# Altium PCB ACS_2.PcbDoc
Units mm, origin at the board's own origin, x right, y up, seen from the top; angles counter-clockwise.
Board outline 90.17 x 95.89 mm, 4 copper layers (Top Layer, Signal Layer 1, Internal Plane 3, Bottom Layer), stack 1.568 mm thick; 50 components, 43 nets, 334 pads, 42 vias.
Unrouted connection lines stored in the file: 4.
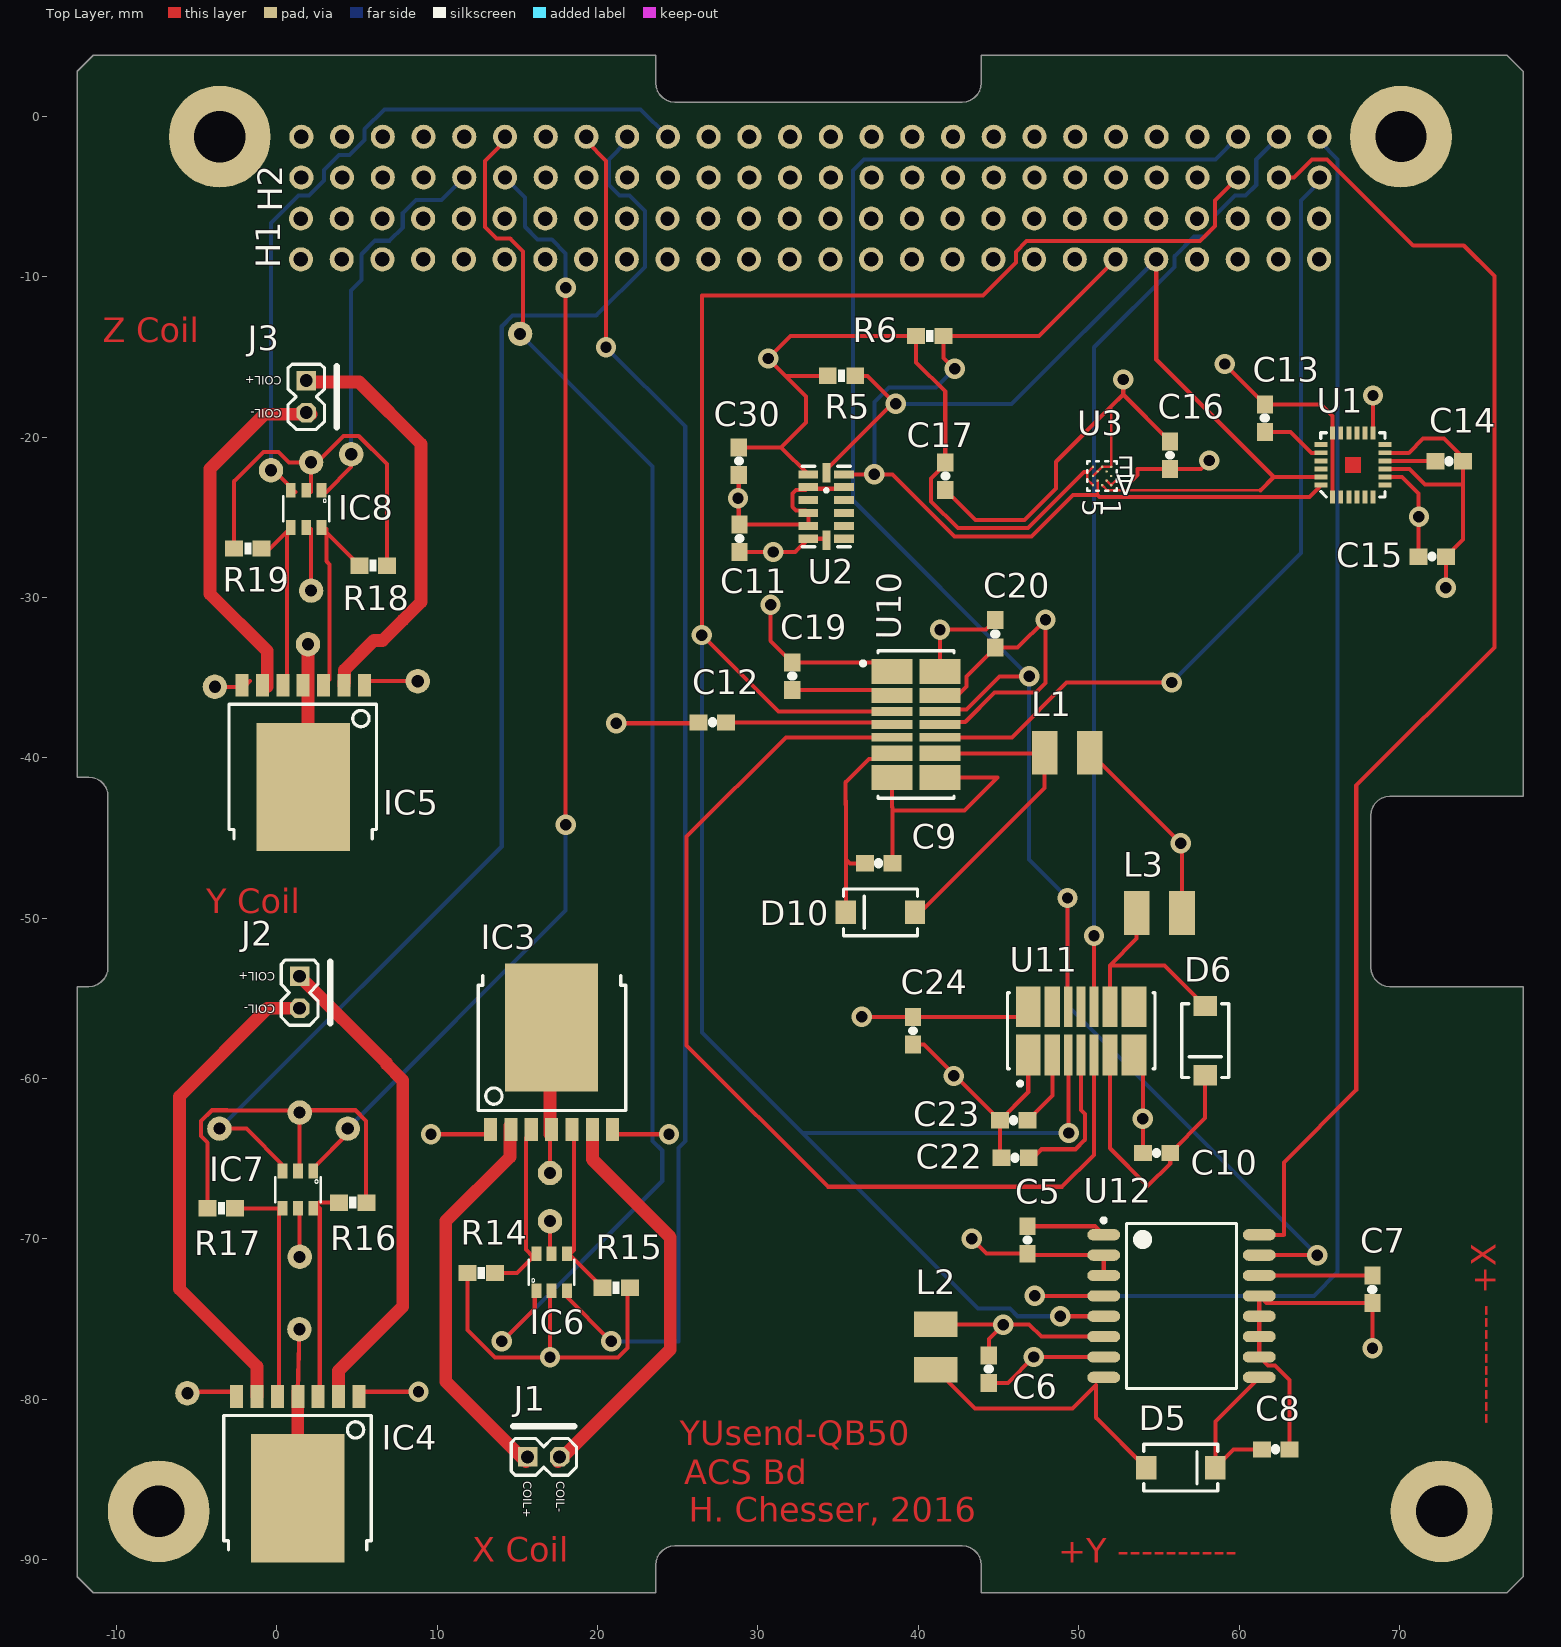
[diagram p0: Top Layer view]
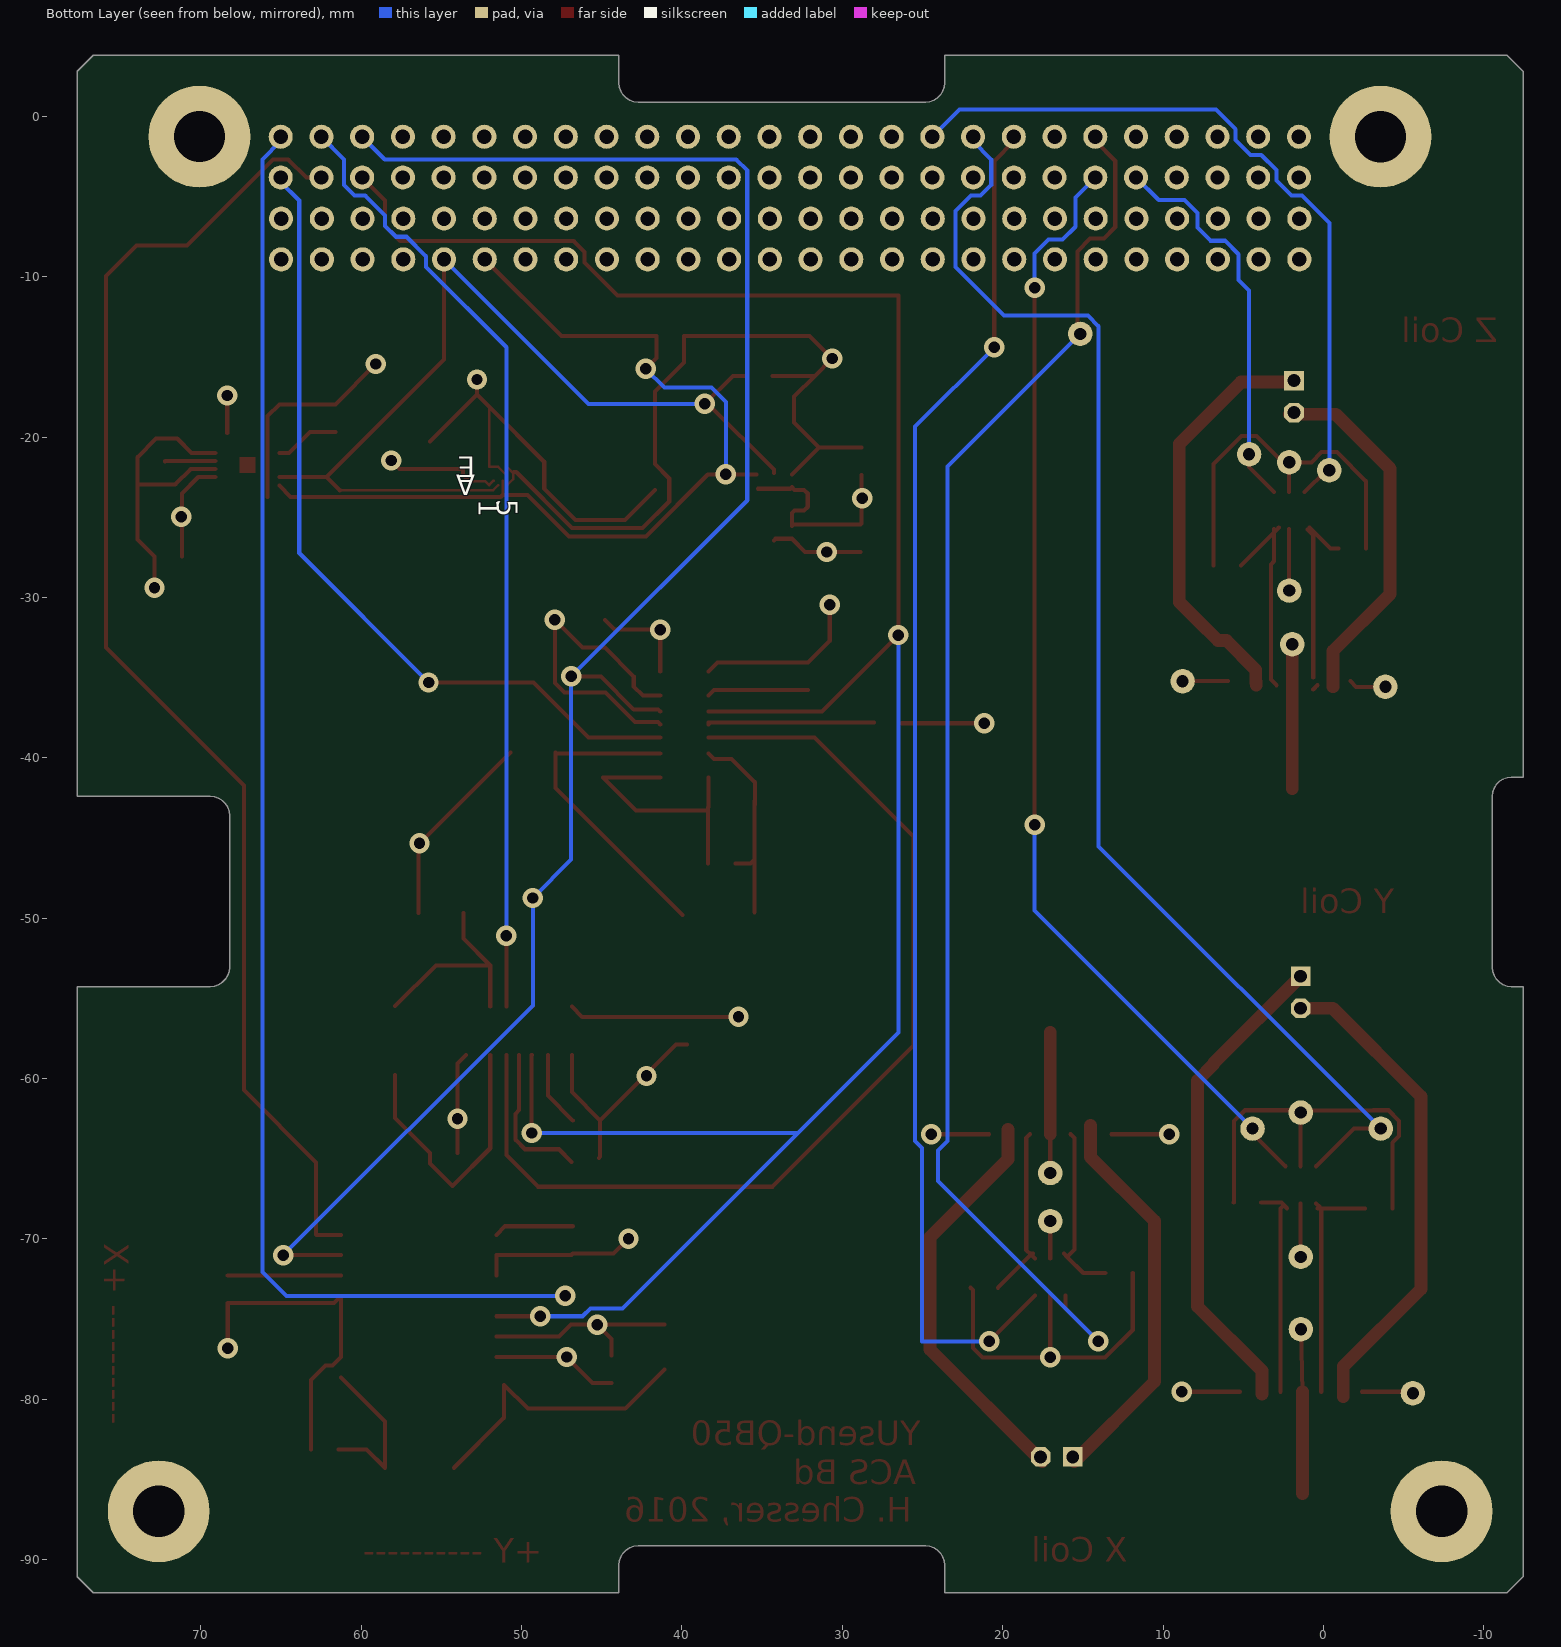
[diagram p1: Bottom Layer view, seen from below]
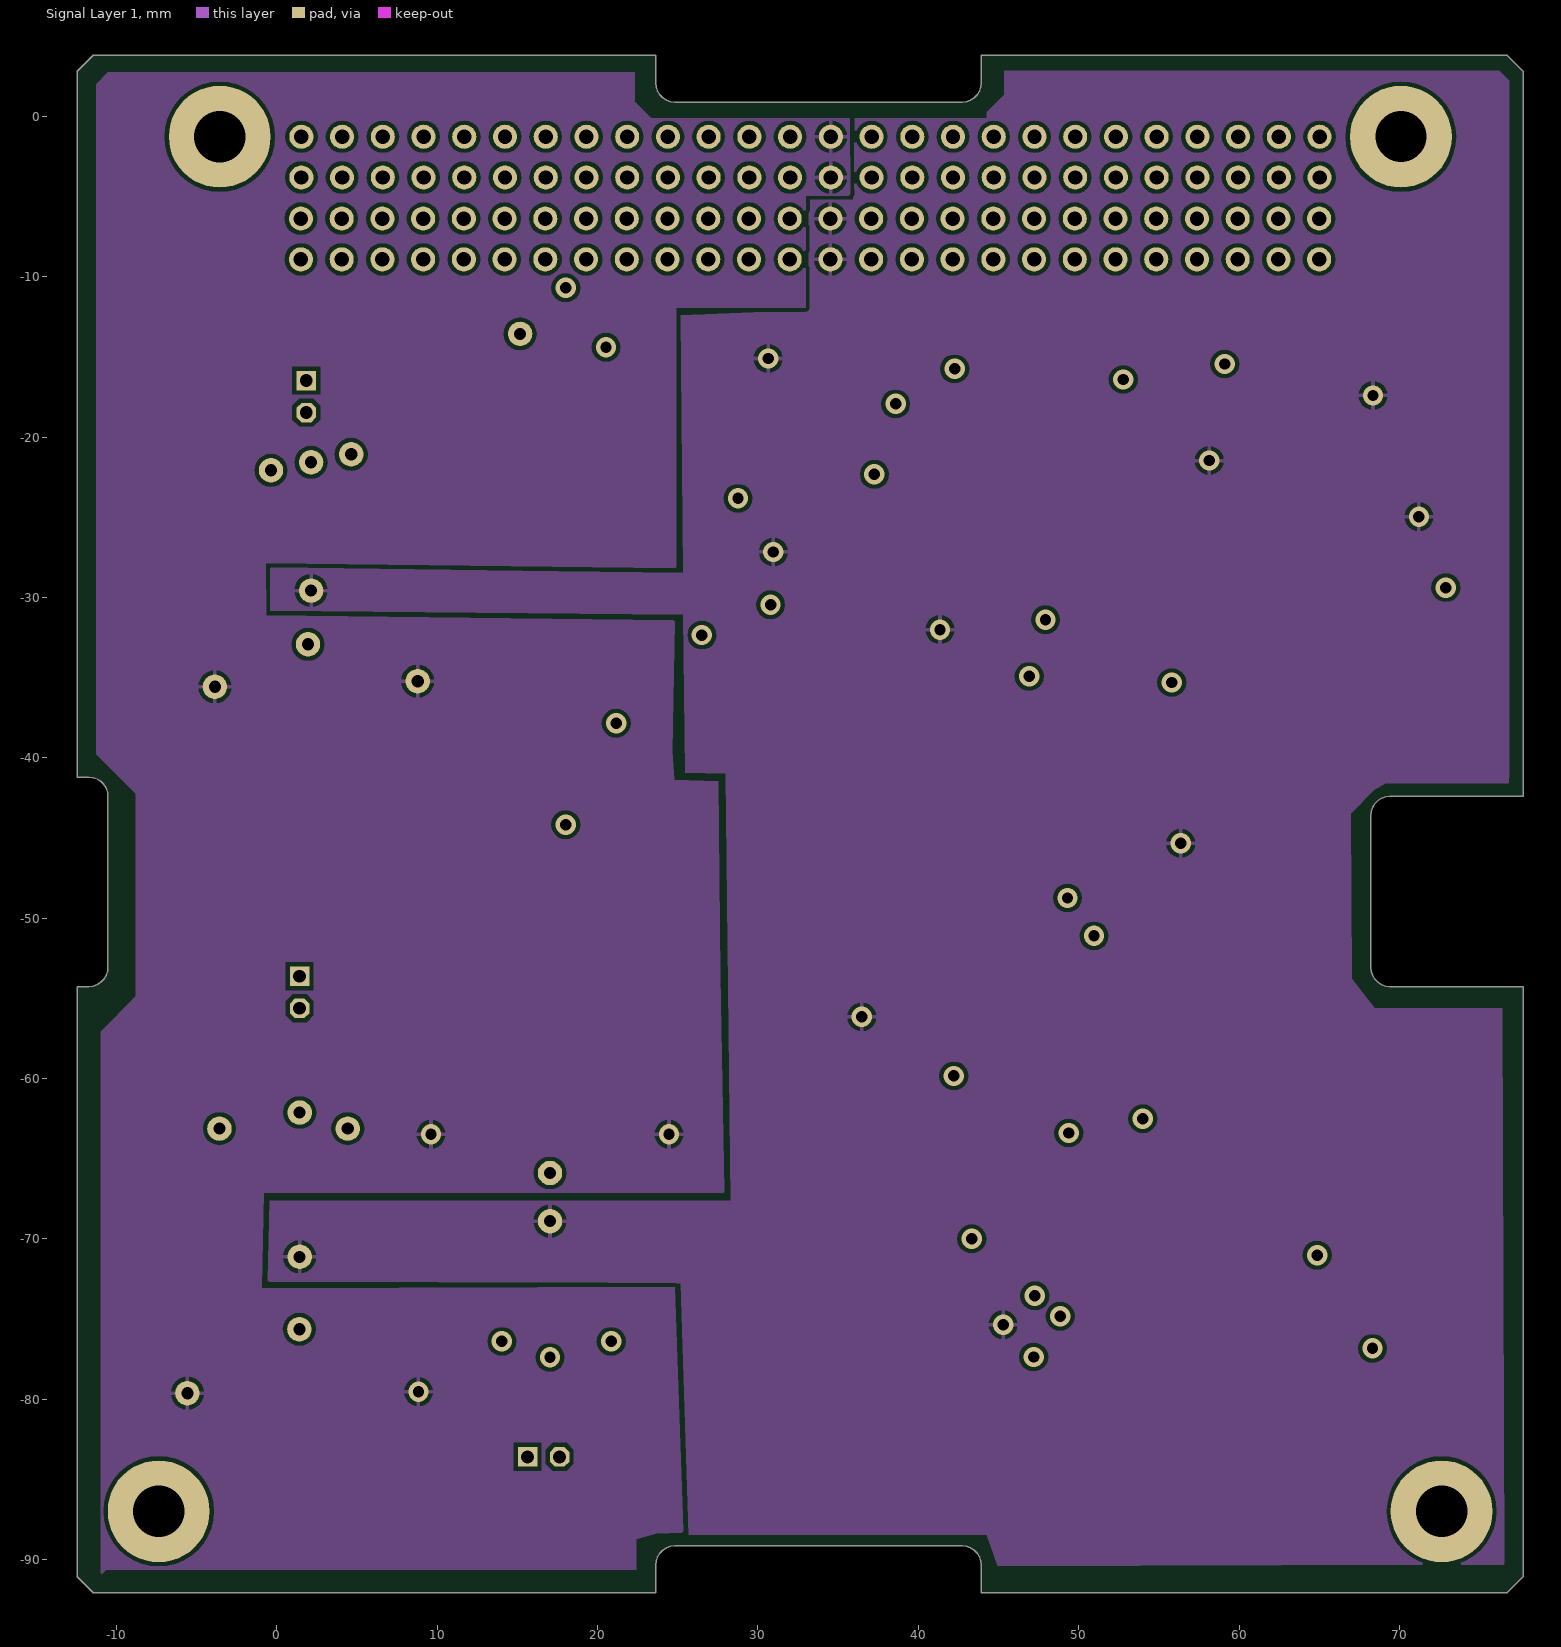
[diagram p2: Signal Layer 1]
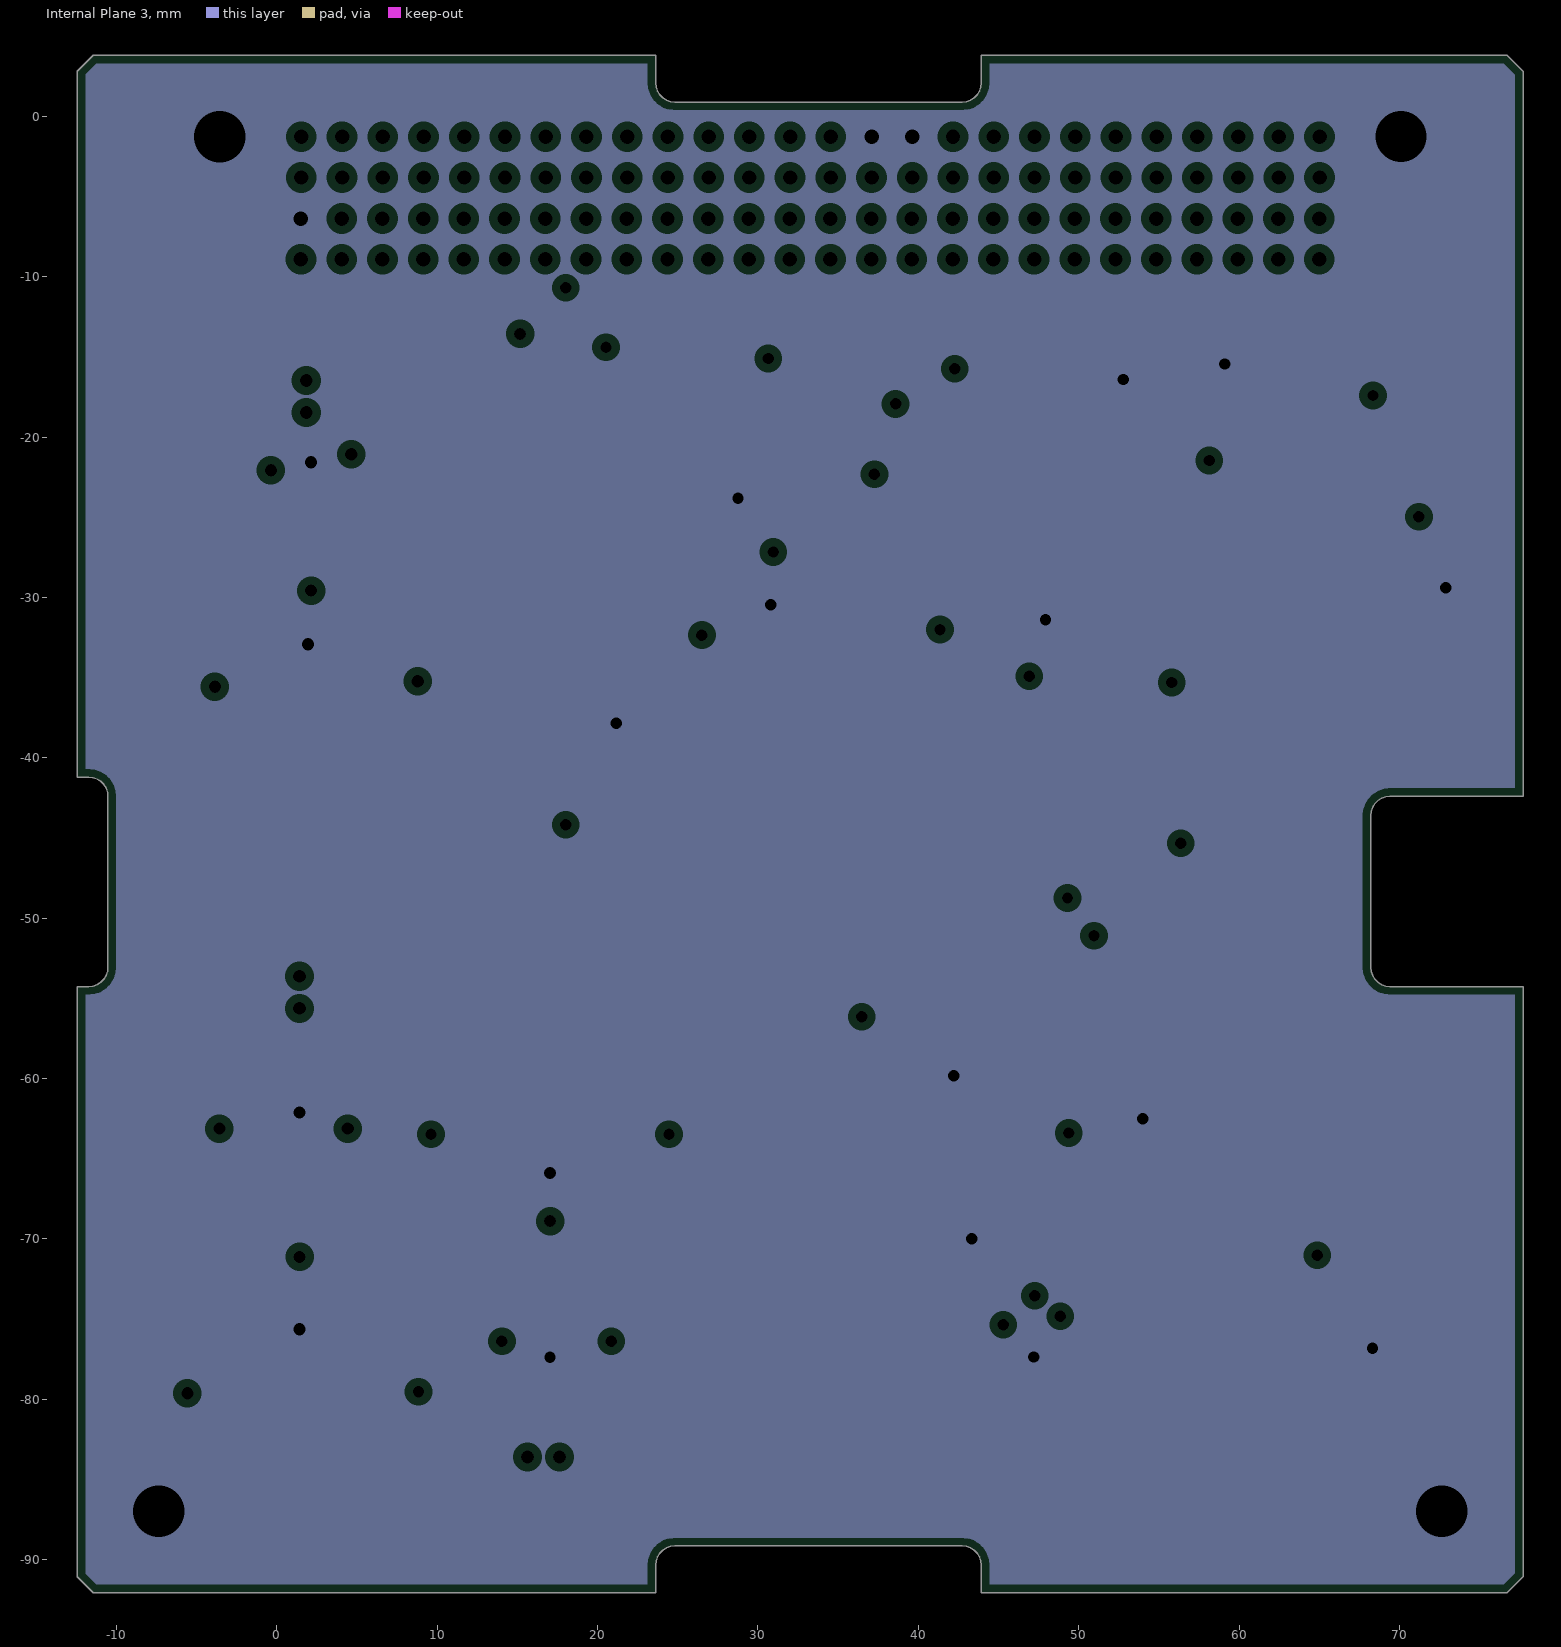
[diagram p3: Internal Plane 3, clearances drawn from the general rule]

## Layer stack, top to bottom
Top Solder: solder mask 0.0102, Solder Resist, Dk 3.5
Top Layer: signal copper 0.0356
Dielectric 1: core 0.475, FR-4, Dk 4.2
Signal Layer 1: signal copper 0.036
Dielectric 3: core 0.475, FR-4, Dk 4.2
Internal Plane 3: plane copper 0.036, net GND
Dielectric 2: core 0.475, FR-4, Dk 4.2
Bottom Layer: signal copper 0.0356
Bottom Solder: solder mask 0.0102, Solder Resist, Dk 3.5

## Board outline
76.715,3.815 43.935,3.815 43.935,2.095 43.905,1.828 43.816,1.574 43.673,1.347 43.483,1.157 43.256,1.014 43.002,0.925 42.735,0.895 24.815,0.895 24.548,0.925 24.294,1.014 24.067,1.157 23.877,1.347 23.734,1.574 23.645,1.828 23.615,2.095 23.615,3.815 -11.455,3.815 -12.455,2.815 -12.455,-41.205 -11.735,-41.205 -11.468,-41.235 -11.214,-41.324 -10.987,-41.467 -10.797,-41.657 -10.654,-41.884 -10.565,-42.138 -10.535,-42.405 -10.535,-53.065 -10.565,-53.332 -10.654,-53.586 -10.797,-53.813 -10.987,-54.003 -11.214,-54.146 -11.468,-54.235 -11.735,-54.265 -12.455,-54.265 -12.455,-91.075 -11.455,-92.075 23.615,-92.075 23.615,-90.355 23.645,-90.088 23.734,-89.834 23.877,-89.607 24.067,-89.417 24.294,-89.274 24.548,-89.185 24.815,-89.155 42.735,-89.155 43.002,-89.185 43.256,-89.274 43.483,-89.417 43.673,-89.607 43.816,-89.834 43.905,-90.088 43.935,-90.355 43.935,-92.075 76.715,-92.075 77.715,-91.075 77.715,-54.265 69.415,-54.265 69.148,-54.235 68.894,-54.146 68.667,-54.003 68.477,-53.813 68.334,-53.586 68.245,-53.332 68.215,-53.065 68.215,-43.605 68.245,-43.338 68.334,-43.084 68.477,-42.857 68.667,-42.667 68.894,-42.524 69.148,-42.435 69.415,-42.405 77.715,-42.405 77.715,2.815

## Design rules (kind name [scope] priority, off if disabled: settings)
Clearance [All] p1: gap=0.254
PlaneClearance [All] p1: clearance=0.508
PlaneConnect [All] p1: planeconnectstyle=Relief reliefexpansion=0.508 reliefentries=4 reliefconductorwidth=0.254 reliefairgap=0.254
PolygonConnect [All] p1: connectstyle=Relief reliefconductorwidth=0.254 reliefentries=4 polygonreliefangle="90 Angle" airgapwidth=0.254
RoutingVias [All] p1: holewidth=0.711 width=1.27 viastyle="Through Hole" minholewidth=0.711 minwidth=1.27 maxholewidth=0.711 maxwidth=1.27
SolderMaskExpansion [All] p1: expansion=0.102
Width GroundTrace [All] p1: maxlimit=0.254 minlimit=0.254 preferedwidth=0.254
Width CoilTraces [(InNet('DRIVE-XA') OR InNet('DRIVE-XB') OR InNet('DRIVE-YA') OR InNet('DRIVE-YB') OR InNet('DRIVE-ZA') OR InNet('DRIVE-ZB'))] p2: maxlimit=1 minlimit=0.254 preferedwidth=0.8 toplayer_minwidth=0.5 midlayer1_maxwidth=0.254 midlayer1_prefwidth=0.254 bottomlayer_minwidth=0.5 minimp=50.000000 maximp=50.000000 favimp=50.000000
Width [InNet('GND')] p3: maxlimit=0.5 minlimit=0.254 preferedwidth=0.4 midlayer1_maxwidth=0.254 midlayer1_prefwidth=0.254 minimp=50.000000 maximp=50.000000 favimp=50.000000
Width PowerTraces [(InNet('3.3V') AND InNet('5V'))] p4: maxlimit=0.5 minlimit=0.254 preferedwidth=0.4 midlayer1_maxwidth=0.254 midlayer1_prefwidth=0.254 minimp=50.000000 maximp=50.000000 favimp=50.000000
27 further rules are at their usual default settings.

## Classes and differential pairs
net class DIR[2..0]: DIR0 DIR1 DIR2
net class I2C(TWI)[1..0]: I2C(TWI)0 I2C(TWI)1
net class PWM[2..0]: PWM0 PWM1 PWM2

## Components (designator, comment, footprint, x,y, rotation, side; value= is the part's Value field where it differs from the comment)
C5 "1uF" 0603-CAP 46.812,-70.079 r90 top
C6 "1uF" 0603-CAP 44.399,-78.13 r90 top
C7 "1uF" 0603-CAP 68.326,-73.152 r90 top
C8 "100nF" 0603-CAP 62.281,-83.134 r0 top
C9 "100nF" 0603-CAP 37.516,-46.584 r0 top
C10 "100nF" 0603-CAP 54.864,-64.643 r180 top
C11 "0.1uF" 0603-CAP 28.854,-26.314 r90 top
C12 "1uF" 0603-CAP 27.153,-37.795 r0 top
C13 "2.2nF" 0603-CAP 61.62,-18.821 r90 top
C14 "0.1uF" 0603-CAP 73.101,-21.514 r0 top
C15 "10nF" 0603-CAP 72.034,-27.457 r0 top
C16 "100nF" 0603-CAP 55.702,-21.133 r90 top
C17 "100nF" 0603-CAP 41.681,-22.428 r270 top
C19 "1uF" 0603-CAP 32.131,-34.9 r270 top
C20 "1uF" 0603-CAP 44.806,-32.283 r90 top
C22 "1uF" 0603-CAP 46.025,-64.948 r0 top
C23 "1uF" 0603-CAP 45.949,-62.611 r0 top
C24 "1uF" 0603-CAP 39.675,-57.023 r90 top
C30 "0.1uF" 0603-CAP 28.804,-21.488 r270 top
D5 "<b>Diode</b> / Standard reverse protection diodes and small signal diodes." DIODE-SMA 56.363,-84.277 r0 top
D6 "<b>Diode</b> / Standard reverse protection diodes and small signal diodes." DIODE-SMA 57.887,-57.633 r270 top
D10 "<b>Diode</b> / Standard reverse protection diodes and small signal diodes." DIODE-SMA 37.643,-49.632 r180 top
H1 "H?" SAMTEC_ESQ_126_39_G_D 1.499,-8.915 r90 top
H2 "H?" SAMTEC_ESQ_126_39_G_D 1.524,-3.81 r90 top
IC3 "BD621*HFP" HRP7 17.131,-58.097 r0 top
IC4 "BD621*HFP" HRP7 1.303,-84.915 r180 top
IC5 "BD621*HFP" HRP7 1.64,-40.555 r180 top
IC6 "SN74LVC1G18-SOT23" SOT23-6 17.131,-72.097 r0 top
IC7 "SN74LVC1G18-SOT23" SOT23-6 1.317,-66.925 r180 top
IC8 "SN74LVC1G18-SOT23" SOT23-6 1.83,-24.475 r180 top
J1 "PINHD-1X2-COIL" HEADER-1X2-COIL 15.631,-83.597 r0 top
J2 "PINHD-1X2-COIL" HEADER-1X2-COIL 1.417,-53.625 r270 top
J3 "PINHD-1X2-COIL" HEADER-1X2-COIL 1.83,-16.475 r270 top
L1 "<b>Inductors</b>" 1210 49.301,-39.675 r180 top
L2 "<b>Inductors</b>" 1210 41.097,-76.733 r270 top
L3 "Inductor" 1210 55.042,-49.682 r180 top
R5 "4.7k" 0603-RES 35.204,-16.18 r0 top
R6 "4.7k" 0603-RES 40.716,-13.691 r0 top
R14 "4.7k" 0603-RES 12.751,-72.136 r180 top
R15 "4.7k" 0603-RES 21.145,-73.05 r0 top
R16 "4.7k" 0603-RES 4.724,-67.742 r0 top
R17 "4.7k" 0603-RES -3.454,-68.097 r180 top
R18 "4.7k" 0603-RES 5.994,-28.016 r0 top
R19 "4.7k" 0603-RES -1.803,-26.949 r180 top
U1 "ITG-3200" QFN-24 67.107,-21.742 r90 top
U2 "ADXL345" LGA14 34.265,-24.341 r90 top
U3 "BMM150" BGA_1590X1590 51.46,-22.428 r180 top
U10 "ADXRS453BEYZ" ADI-EY-14-1_V 39.853,-37.922 r270 top
U11 "ADXRS453BEYZ" ADI-EY-14-1_V 50.156,-57.024 r0 top
U12 "ADXRS453BRGZ" ADI-RG-16-1_M 56.413,-74.193 r0 top

## Footprints (in the part's own frame and the unit in brackets; to place one, negate y for a bottom-side part, rotate by r counter-clockwise, add the part's x,y. Pads: shape width x height; smd on the part's side, far side on the other; paste and mask are expansions set on the pad)
0603-CAP [mil]
  rect 44x40 smd: 1(-33.46,0) 2(34,0)
  silkscreen extent 0,-1 0,2
0603-RES [mil]
  rect 44x40 smd: 1(-33.46,0) 2(34,0)
  silkscreen extent -9,-15 9,15
1210 [mil]
  rect 63x107 smd: 1(-55.12,0) 2(56,0)
ADI-EY-14-1_V [mm] "LCC, 14-Leads, Body 4x9mm"
  rect 1.55x2.55 smd: 1(-3.3,-1.5) 7(3.3,-1.5) 8(3.3,1.5) 14(-3.3,1.5)
  rect 0.95x2.55 smd: 2(-1.8,-1.5) 6(1.8,-1.5) 9(1.8,1.5) 13(-1.8,1.5)
  rect 0.55x2.55 smd: 3(-0.8,-1.5) 4(0,-1.5) 5(0.8,-1.5) 10(0.8,1.5) 11(0,1.5) 12(-0.8,1.5)
  silkscreen extent -4.6,-3.43 4.6,2.37, body extent -4.5,-2.29 4.5,2.16, height 9.15
ADI-RG-16-1_M [mm] "SOIC, 16-Leads, Body 10.3x7.8mm, Pitch 1.27mm, IPC Low Density"
  oval 2.05x0.7 smd: 1(-4.85,4.445) 2(-4.85,3.175) 3(-4.85,1.905) 4(-4.85,0.635) 5(-4.85,-0.635) 6(-4.85,-1.905) 7(-4.85,-3.175) 8(-4.85,-4.445) 9(4.85,-4.445) 10(4.85,-3.175) 11(4.85,-1.905) 12(4.85,-0.635) 13(4.85,0.635) 14(4.85,1.905) 15(4.85,3.175) 16(4.85,4.445)
  silkscreen extent -4.97,-5.15 3.42,5.47, body extent -3.9,-5.15 3.9,5.15, height 3.73
BGA_1590X1590 [mil]
  round 6 smd paste+0 mask+0: A1(-22.28,22.28) A3(0,22.28) A5(22.28,22.28) B2(-11.14,11.14) B4(11.14,11.14) C1(-22.28,0) C5(22.28,0) D2(-11.14,-11.14) D4(11.14,-11.14) E1(-22.28,-22.28) E3(0,-22.28) E5(22.28,-22.28)
  silkscreen extent -37,-37 37,37, body extent -31,-31 31,32, height 23
DIODE-SMA [mil]
  rect 50x58 smd: A(-84.65,0) C(85,0)
  silkscreen extent -91,-57 91,58
HEADER-1X2-COIL [mm]
  rect 1.22x1.22 hole 0.8: 1(0,0)
  oct 1.22x1.22 hole 0.8: 2(2,0)
  silkscreen extent -1.02,-1.14 3.05,1.91, body extent -2.87,-2.65 4.83,2.9, height 8.51
HRP7 [mil]
  rect 32x56 smd: 1(-150,-200) 2(-100,-200) 3(-50,-200) 4(0,-200) 5(50,-200) 6(100,-200) 7(150,-200)
  rect 229x315 smd: P(0,50)
  silkscreen extent -180,-154 182,177
LGA14 [mil]
  rect 20x48 smd: 1(79,44) 2(48,44) 3(16,44) 4(-15.75,44) 5(-47.24,44) 6(-78.74,44) 8(-78.74,-43.31) 9(-47.24,-43.31) 10(-15.75,-43.31) 11(16,-43.31) 12(48,-43.31) 13(79,-43.31)
  rect 48x20 smd: 7(-82.68,0) 14(83,0)
  silkscreen extent -98,-59 99,60
QFN-24 [mil]
  rect 32x12 smd: 1(-78.74,50) 2(-78.74,30) 3(-78.74,10) 4(-78.74,-9.84) 5(-78.74,-29.53) 6(-78.74,-49.21) 13(79,-49.21) 14(79,-29.53) 15(79,-9.84) 16(79,10) 17(79,30) 18(79,50)
  rect 12x32 smd: 7(-49.21,-78.74) 8(-29.53,-78.74) 9(-9.84,-78.74) 10(10,-78.74) 11(30,-78.74) 12(50,-78.74) 19(50,79) 20(30,79) 21(10,79) 22(-9.84,79) 23(-29.53,79) 24(-49.21,79)
  Top Layer region: -19.68,-19.69 20,-19.69 20,20 -19.68,20
  silkscreen extent -79,-79 79,79
SAMTEC_ESQ_126_39_G_D [mm]
  round 1.5 hole 0.9: 1(0,0) 2(2.54,0) 3(0,-2.54) 4(2.54,-2.54) 5(0,-5.08) 6(2.54,-5.08) 7(0,-7.62) 8(2.54,-7.62) 9(0,-10.16) 10(2.54,-10.16) 11(0,-12.7) 12(2.54,-12.7) 13(0,-15.24) 14(2.54,-15.24) 15(0,-17.78) 16(2.54,-17.78) 17(0,-20.32) 18(2.54,-20.32) 19(0,-22.86) 20(2.54,-22.86) 21(0,-25.4) 22(2.54,-25.4) 23(0,-27.94) 24(2.54,-27.94) 25(0,-30.48) 26(2.54,-30.48) 27(0,-33.02) 28(2.54,-33.02) 29(0,-35.56) 30(2.54,-35.56) 31(0,-38.1) 32(2.54,-38.1) 33(0,-40.64) 34(2.54,-40.64) 35(0,-43.18) 36(2.54,-43.18) 37(0,-45.72) 38(2.54,-45.72) 39(0,-48.26) 40(2.54,-48.26) 41(0,-50.8) 42(2.54,-50.8) 43(0,-53.34) 44(2.54,-53.34) 45(0,-55.88) 46(2.54,-55.88) 47(0,-58.42) 48(2.54,-58.42) 49(0,-60.96) 50(2.54,-60.96) 51(0,-63.5) 52(2.54,-63.5)
  body extent -1.27,-65.02 3.81,1.52, height 11.05
SOT23-6 [mil]
  rect 24x36 smd: 1(-37.4,-45.28) 2(0,-45.28) 3(38,-45.28) 4(38,46) 5(0,46) 6(-37.4,46)
  silkscreen extent -56,-31 56,31

## Part data
C5 C6 C7 C8 C9 C10 C11 C12 C13 C14 C15 C19 C20 C22 C23 C24 C30: library part CAPACITOR-0603, "<b>Capacitor</b> / Standard SMT, and 0.1\", and 0.2\" leaded ceramic capacitors"
C16 C17: library part CAPACITOR-0603
D5 D6 D10: library part DIODE-SMA
H1 H2: library part SAMTEC_ESQ_126_39_G_D, "26X2 header"
IC3: "H-bridge driver for brush motors BD621* have minimum 3V power input, BD62*2 have 2A current rating</p> / Source: http://www.rohm.com/products/databook/motor/pdf/bd623x_series-e.pdf"
IC4 IC5: "<b>H-bridge driver</b> for brush motors / <p>BD621* have minimum 3V power input, BD62*2 have 2A current rating</p> / Source: http://www.rohm.com/products/databook/motor/pdf/bd623x_series-e.pdf"
IC6 IC7 IC8: "<b>1-of-2 Noninverting Demultiplexer with 3-state Deselected Output</b> / <p>Function-Compatible with SN74AUC1G19 Decoder/Demultiplexer (for High Deselected Output)<p>"
L1 L2 L3: library part INDUCTOR-1210_470uH
R5 R6 R14 R15 R16 R17 R18 R19: library part RESISTOR-0603, "<p><b>Resistor</b></p> / Basic schematic elements and footprints for resistors."
U1: "ITG-3200 3-axis gyro, digital output, qfn24 package"
U3: "Imported"
U10 U11: library part CMP-0885-00107-1, "High Performance, Digital Output Gyroscope with SPI, 77.5 Hz BW, Industrial, 14-pin LCC, Tube"
U12: library part CMP-0885-00109-1, "High Performance, Digital Output Gyroscope with SPI, 77.5 Hz BW, Industrial, 16-pin SOIC, Tube"

## Free pads (board coordinates)
  round 1.524 hole 0.762: 0(1.94,-32.925) 0(17.031,-68.897) 1(-3.87,-35.575) 1(17.031,-65.897) 2(8.78,-35.225) 2(15.164,-13.564) 3(2.13,-29.575) 4(2.13,-21.575) 5(4.63,-21.075) 6(-0.37,-22.075) 7(1.417,-71.125) 8(1.403,-75.639) 9(-5.583,-79.625) 11(1.417,-62.125) 12(-3.583,-63.125) 13(4.417,-63.125)
  round 6.35 hole 3.2: 1(-7.375,-86.995) 1(-3.565,-1.265) 1(72.635,-86.995)
  round 0.5 hole 0.5: 1(1.515,-8.885) 1(1.515,-3.805)
  round 6.35 hole 3.175: 1(70.095,-1.265)

## Via types
v1: diameter 1.27, hole 0.711, Top Layer to Bottom Layer, 42 vias

## Nets (pads, with @x,y where several pads share a name; then routed paths per layer and width w, separated by ;. In a path a pad name is that pad's centre, name@x,y a point inside that pad or via, vN(x,y) a via of type N, cw(c..) or ccw(c..) an arc to the next point about the centre after c; other vN are vias at no path point)
3.3V: C6.2 C11.1 C15.1 C16.1 C17.1 C20.2 C24.2 C30.1 H1.27 H1.28 IC6.5 IC7.5 IC8.5 L1.1 L2.1 L3.1 pad.0@17.031,-68.897 pad.3 pad.7 R5.1 R6.1 U1.8 U1.13 U2.1 U2.6 U2.7 U3.A1 U3.A5 U3.B2 U3.E5 U10.14 U11.14 U12.6 | length 123.2
  Top Layer w0.154: U3.A5 50.533,-22.633 50.533,-22.236 U3.E5@50.894,-21.875 ; U3.B2 U3.A1 52.28,-22.741 53.289,-22.741
  Top Layer w0.254: pad.7 IC7.5@1.417,-67.794 ; pad.3 IC8.5@2.13,-25.743 ; IC6.5@17.031,-71.229 pad.0@17.031,-68.897 ; C30.1 31.451,-20.638 ; C11.1 32.324,-27.164 U2.6 34.165,-26.341 U2.7 ; U2.1 31.451,-20.638 ; R5.1 31.713,-16.18 ; v1(36.474,-56.159) C24.2 46.221,-56.159 U11.14 ; L2.1 46.911,-75.333 47.676,-76.098 U12.6 ; U10.14 v1(41.353,-32.005) 44.22,-32.005 C20.2 ; C6.2 44.399,-76.251 v1(45.288,-75.362) ; 50.486,-22.189 50.335,-22.189 46.845,-25.679 42.463,-25.679 40.792,-24.008 40.792,-22.575 41.681,-21.686 C17.1 41.681,-17.161 39.866,-15.346 R6.1 32.041,-13.691 v1(30.632,-15.099) 31.713,-16.18 ; L1.1 56.442,-45.415 L3.1 ; 53.289,-22.741 53.656,-22.374 53.656,-21.983 C16.1 57.621,-21.983 v1(58.141,-21.463) ; U1.13 v1(68.357,-17.404) ; U1.8 70.167,-22.492 71.184,-23.51 C15.1 ; 31.451,-20.638 33.008,-19.081 33.008,-17.475 31.713,-16.18
  other v1: 56.366,-45.339 30.963,-27.164 71.222,-24.968
5V: H2.27 H2.28 IC3.1 IC3.7 IC4.1 IC4.7 IC5.1 IC5.7 pad.1@-3.87,-35.575 pad.2@8.78,-35.225 pad.9 | length 19.7
  Top Layer w0.254: pad.9@-5.493,-79.535 IC4.7@-2.407,-79.535 ; pad.1@-3.87,-35.575 -2.03,-35.575 -1.68,-35.225 ; IC4.1@5.213,-79.535 v1(8.827,-79.535) v1@8.917,-79.625 ; 5.94,-35.225 8.78,-35.225 pad.2@9.13,-35.575 ; v1(9.611,-63.477) IC3.1@13.221,-63.477 ; IC3.7@20.841,-63.477 v1(24.451,-63.477)
CS-X: H2.50 U11.10 | length 59.8
  Top Layer w0.254: U11.10 v1(50.956,-51.108)
  Bottom Layer w0.254: v1(50.956,-51.108) 50.956,-14.398 55.97,-9.384 55.97,-8.725 57.188,-7.506 57.847,-7.506 58.51,-6.844 58.51,-6.185 59.753,-4.941 60.412,-4.941 61.075,-4.279 61.075,-2.679 H2.50
CS-Y: H2.51 U10.10 | length 51.2
  Top Layer w0.254: U10.10 45.834,-38.722 49.251,-35.306 v1(55.804,-35.306)
  Bottom Layer w0.254: v1(55.804,-35.306) 63.868,-27.242 63.868,-5.244 65.024,-4.088 H2.51
CS-Z: H2.52 U12.4 | length 95.1
  Top Layer w0.254: v1(47.269,-73.558) U12.4
  Bottom Layer w0.254: v1(47.269,-73.558) 64.668,-73.558 66.155,-72.072 66.155,-2.679 65.024,-1.548 H2.52
DIR0: H2.12 IC6.1 pad.2@15.164,-13.564 | length 88.6
  Top Layer w0.254: v1(14.031,-76.397) 16.081,-74.347 IC6.1@16.081,-73.547 ; H2.12@14.215,-1.265 14.215,-1.543 12.979,-2.779 12.979,-6.909 13.691,-7.62 14.55,-7.62 15.346,-8.417 pad.2@15.346,-13.564
  Bottom Layer w0.254: v1(14.031,-76.397) 24.031,-66.397 24.031,-64.494 23.435,-63.898 23.435,-21.835 pad.2@15.164,-13.564
DIR1: H2.11 IC7.1 pad.13 | length 70.2
  Top Layer w0.254: IC7.1@2.367,-65.475 4.417,-63.425 pad.13 ; v1(18.009,-44.171) v1(18.009,-10.693)
  Bottom Layer w0.254: pad.13 18.009,-49.533 v1(18.009,-44.171) ; H2.11@14.215,-3.805 15.469,-5.058 15.469,-6.883 16.256,-7.671 17.14,-7.671 18.009,-8.539 v1(18.009,-10.693)
DIR2: H2.9 IC8.1 pad.5 | length 24.6
  Top Layer w0.254: IC8.1@3.08,-23.425 4.63,-21.875 pad.5
  Bottom Layer w0.254: pad.5 4.63,-10.85 5.283,-10.197 5.283,-8.598 6.127,-7.754 7.029,-7.754 7.849,-6.934 7.849,-6.032 8.667,-5.214 10.266,-5.214 H2.9@11.675,-3.805
DRIVE-XA: IC3.2 J1.1 | length 24.7
  Top Layer w0.8: IC3.2@14.531,-62.937 14.531,-64.897 10.531,-68.897 10.531,-78.897 J1.1@15.531,-83.897
DRIVE-XB: IC3.6 J1.2 | length 25.6
  Top Layer w0.8: J1.2@17.531,-83.897 24.531,-76.897 24.531,-69.897 19.671,-65.037 IC3.6
DRIVE-YA: IC4.2 J2.1 | length 30.4
  Top Layer w0.8: J2.1 6.833,-59.041 6.833,-59.106 7.849,-60.122 7.849,-74.219 3.835,-78.232 IC4.2@3.835,-79.681
DRIVE-YB: IC4.6 J2.2 | length 31.3
  Top Layer w0.254: IC4.6@-1.083,-79.989 IC4.6@-1.083,-79.125
  Top Layer w0.8: IC4.6@-1.245,-79.828 -1.245,-77.964 -6.083,-73.125 -6.083,-61.125 -0.583,-55.625 J2.2
DRIVE-ZA: IC5.2 J3.1 | length 25.9
  Top Layer w0.8: J3.1@2.13,-16.575 5.13,-16.575 8.992,-20.436 8.992,-30.277 7.864,-31.405 6.579,-32.69 6.045,-32.69 4.216,-34.519 4.216,-35.311 4.18,-35.275 IC5.2
DRIVE-ZB: IC5.6 J3.2 | length 22.8
  Top Layer w0.8: IC5.6@-0.6,-35.575 -0.6,-33.345 -4.166,-29.779 -4.166,-21.971 -0.77,-18.575 J3.2@2.13,-18.575
GND: C5.1 C6.1 C7.1 C8.2 C9.2 C10.2 C11.2 C12.1 C13.2 C14.2 C15.2 C16.2 C17.2 C19.1 C20.1 C22.1 C23.1 C24.1 C30.2 H1.2 H2.30 H2.32 IC3.4 IC3.P IC4.4 IC4.P IC5.4 IC5.P IC6.2 IC7.2 IC8.2 pad.0@1.94,-32.925 pad.1@17.031,-65.897 pad.1@70.095,-1.265 pad.1@72.635,-86.995 pad.1@-3.565,-1.265 pad.1@-7.375,-86.995 pad.4 pad.8 pad.11 R14.2 R15.2 R16.2 R17.2 R18.2 R19.2 U1.1 U1.9 U1.11 U1.18 U2.2 U2.4 U2.5 U2.12 U3.C5 U3.E1 U3.E3 U10.1 U10.7 U10.8 U10.11 U10.13 U11.1 U11.7 U11.8 U11.11 U11.13 U12.2 U12.3 U12.7 U12.10 U12.11 U12.12 U12.13 | length 284.1
  Top Layer w0.154: U3.C5 U3.E3 U3.E1 52.026,-18.103
  Top Layer w0.254: R17.2 -4.318,-64.007 -4.726,-63.599 -4.726,-62.652 -4.057,-61.982 -3.11,-61.982 -3.091,-62.001 1.293,-62.001 pad.11 ; R19.2 -2.667,-22.756 -0.843,-20.932 0.104,-20.932 0.747,-21.575 pad.4 ; IC4.4@1.301,-79.535 pad.8 ; IC7.2@1.417,-65.475 pad.11 ; IC8.2@2.13,-23.425 pad.4 ; R16.2 5.56,-67.714 5.56,-62.652 4.89,-61.982 1.56,-61.982 pad.11 ; R18.2 6.858,-21.686 5.104,-19.932 4.157,-19.932 2.514,-21.575 pad.4 ; R14.2 11.887,-75.69 13.61,-77.413 17.015,-77.413 v1(17.031,-77.397) ; IC6.2@17.031,-73.547 v1(17.031,-77.397) ; pad.1@17.031,-65.897 IC3.4@17.031,-63.477 ; v1(21.158,-37.846) C12.1@26.303,-37.846 ; R15.2 21.862,-73.196 21.862,-76.818 21.267,-77.413 17.047,-77.413 v1(17.031,-77.397) ; C30.2 28.804,-25.4 C11.2 33.056,-25.451 U2.5 U2.4 32.976,-24.57 32.38,-24.57 32.156,-24.347 32.156,-23.523 32.38,-23.3 32.969,-23.3 U2.2 33.249,-23.224 U2.12@35.263,-23.224 ; v1(30.785,-30.455) 30.785,-32.703 C19.1 37.78,-34.05 U10.1 ; U10.7 38.353,-43.078 38.379,-43.105 38.379,-43.28 ; C9.2 38.379,-43.28 ; C24.1 40.361,-57.873 C23.1 ; U10.8 44.931,-41.222 42.873,-43.28 38.379,-43.28 ; U10.11 41.497,-37.778 42.927,-37.778 44.764,-35.941 47.335,-35.941 47.93,-35.346 v1(47.93,-31.394) 46.191,-33.133 C20.1 43.009,-34.93 43.009,-35.555 42.441,-36.122 U10.13 ; C17.2 43.561,-25.171 46.634,-25.171 48.59,-23.216 48.59,-21.539 52.026,-18.103 52.781,-17.348 ; v1(43.332,-70.002) 44.259,-70.929 C5.1 46.902,-71.018 U12.2 U12.3 ; C6.1 45.581,-78.98 v1(47.193,-77.368) U12.7 ; C22.1 45.099,-64.872 C23.1 ; U11.1 46.856,-60.854 C23.1 ; v1(52.781,-16.408) 52.781,-17.348 ; U11.7 54,-59.069 C10.2 ; C16.2 52.781,-17.348 ; v1(59.106,-15.443) C13.2 65.1,-17.958 65.837,-18.694 U1.18 U1.1 ; C8.2 63.144,-78.811 62.241,-77.907 61.802,-77.907 U12.10 U12.11 U12.12 U12.13 61.707,-74.002 C7.1 v1(68.326,-76.835) ; U1.9 70.633,-21.992 71.603,-22.962 73.965,-22.962 ; U1.11 70.587,-20.98 71.476,-20.091 72.796,-20.091 73.965,-21.26 C14.2 73.965,-22.962 ; v1@72.898,-29.515 C15.2 73.965,-26.391 73.965,-22.962
  Top Layer w0.8: IC4.P@1.301,-85.885 IC4.4@1.301,-79.535 ; IC5.P@1.94,-41.925 pad.0@1.94,-32.925 ; IC3.4@17.031,-63.477 IC3.P@17.031,-57.127
  other v1: 54,-62.509 42.215,-59.842 72.898,-29.388 28.753,-23.825
I2C(TWI)_0: H1.41 R6.2 U1.24 U2.13 U3.B4 | length 59
  Top Layer w0.154: 51.177,-23.6 U3.B4
  Top Layer w0.254: U2.13 35.373,-22.327 v1(37.262,-22.327) 38.392,-22.327 42.253,-26.187 47.055,-26.187 49.642,-23.6 51.177,-23.6 51.301,-23.724 64.402,-23.724 U1.24@65.1,-23.026 ; v1(42.266,-15.748) 41.58,-15.062 R6.2 47.523,-13.691 H1.41
  Bottom Layer w0.254: v1(37.262,-22.327) 37.262,-17.816 38.162,-16.916 41.097,-16.916 v1(42.266,-15.748)
I2C(TWI)_1: H1.43 R5.2 U1.23 U2.14 U3.A3 | length 60.2
  Top Layer w0.154: U3.A3 51.783,-23.317 61.341,-23.317
  Top Layer w0.254: U2.14 34.265,-22.032 38.365,-17.932 v1(38.583,-17.932) 36.83,-16.18 R5.2 ; H1.43 54.839,-15.165 62.166,-22.492 ; 61.341,-23.317 62.166,-22.492 ; U1.23 62.166,-22.492
  Bottom Layer w0.254: v1(38.583,-17.932) 45.822,-17.932 H1.43
MISO: H2.47 U10.3 U11.3 U12.5 | length 151.5
  Top Layer w0.254: U10.3 31.28,-37.122 v1(26.505,-32.347) 26.505,-11.163 44.03,-11.163 46.088,-9.106 46.088,-8.447 46.75,-7.784 57.569,-7.784 58.51,-6.844 58.51,-5.244 H2.47 ; v1(48.844,-74.828) U12.5 ; U11.3 49.378,-58.546 v1(49.378,-63.398)
  Bottom Layer w0.254: v1(26.505,-32.347) 26.505,-57.137 32.766,-63.398 ; v1(48.844,-74.828) 46.192,-74.828 45.709,-74.346 43.713,-74.346 32.766,-63.398 ; v1(49.378,-63.398) 32.766,-63.398
MOSI: H2.48 U10.12 U11.12 U12.15 | length 121.4
  Top Layer w0.254: U10.12 41.497,-36.978 43.009,-36.978 45.062,-34.925 v1(46.914,-34.925) ; v1(49.301,-48.743) 49.301,-55.47 U11.12 ; U12.15 v1(64.872,-71.018)
  Bottom Layer w0.254: H2.48 58.535,-2.679 36.615,-2.679 35.928,-3.367 35.928,-23.939 v1(46.914,-34.925) 46.914,-46.355 v1(49.301,-48.743) 49.301,-55.448 v1(64.872,-71.018)
NetC5_2: C5.2 U12.1 | length 5
  Top Layer w0.254: C5.2 51.03,-69.215 U12.1
NetC7_2: C7.2 U12.14 | length 7.1
  Top Layer w0.254: U12.14 C7.2
NetC8_1: C8.1 D5.C U12.9 | length 10.2
  Top Layer w0.254: U12.9 58.522,-81.38 D5.C 59.665,-83.134 C8.1
NetC9_1: C9.1 D10.C U10.6 | length 13.2
  Top Layer w0.254: 35.458,-42.901 35.458,-41.528 36.92,-40.066 38.009,-40.066 U10.6 ; D10.C 35.484,-46.33 ; 35.484,-42.69 35.484,-46.33 ; C9.1 35.738,-46.584 35.484,-46.33
NetC10_1: C10.1 D6.C U11.6 | length 17.5
  Top Layer w0.254: U11.6 51.956,-64.351 54.305,-66.7 55.714,-65.292 C10.1 57.887,-62.47 D6.C
NetC12_2: C12.2 U10.4 | length 10.4
  Top Layer w0.254: C12.2 U10.4@38.353,-37.795 ; U10.4@38.276,-37.846 U10.4
NetC13_1: C13.1 U1.20 | length 4
  Top Layer w0.254: C13.1 63.202,-19.671 64.511,-20.98 U1.20
NetC14_1: C14.1 U1.10 | length 3.2
  Top Layer w0.254: U1.10 72.226,-21.488 C14.1
NetC19_2: C19.2 U10.2 | length 6.4
  Top Layer w0.254: C19.2 32.146,-35.778 38.009,-35.778 U10.2
NetC22_2: C22.2 U11.4 | length 9.5
  Top Layer w0.254: C22.2@46.888,-65.202 47.676,-64.414 49.798,-64.414 50.394,-63.819 50.394,-62.205 50.156,-61.967 U11.4
NetC23_2: C23.2 U11.2 | length 4.7
  Top Layer w0.254: C23.2 48.356,-61.068 U11.2
NetIC3_3: IC3.3 IC6.6 R14.1 | length 11
  Top Layer w0.254: R14.1 14.974,-72.136 IC6.6@15.981,-71.129 ; IC3.3@15.761,-63.477 15.531,-63.707 15.531,-70.679 IC6.6@15.981,-71.129 ; IC6.6 IC6.6@15.981,-71.129
NetIC3_5: IC3.5 IC6.4 R15.1 | length 11.1
  Top Layer w0.254: IC6.4@17.996,-71.229 IC6.4@18.234,-70.99 ; IC6.4 18.173,-70.929 IC6.4@18.234,-70.99 ; IC3.5@18.301,-63.477 18.531,-63.707 18.531,-70.694 IC6.4@18.234,-70.99 ; R15.1 IC6.4@18.234,-70.99
NetIC4_3: IC4.3 IC7.6 R16.1 | length 13.5
  Top Layer w0.254: IC7.6 IC7.6@2.467,-67.894 ; IC4.3@2.673,-79.535 2.673,-68.1 IC7.6@2.467,-67.894 ; R16.1 2.619,-67.742 IC7.6@2.467,-67.894
NetIC4_5: IC4.5 IC7.4 R17.1 | length 14.7
  Top Layer w0.254: R17.1 IC7.4@0.148,-68.097 ; IC4.5@0.133,-79.535 0.133,-68.112 IC7.4@0.148,-68.097 ; IC7.4@0.252,-67.994 IC7.4@0.452,-67.794 ; IC7.4 0.348,-68.097 IC7.4@0.148,-68.097
NetIC5_3: IC5.3 IC8.6 R18.1 | length 13.3
  Top Layer w0.254: IC8.6 IC8.6@3.08,-25.943 ; IC5.3 3.273,-35.112 3.273,-27.936 3.08,-27.743 IC8.6@3.08,-25.943 ; IC8.6@3.08,-25.743 IC8.6@3.08,-25.943 ; R18.1 5.144,-28.008 IC8.6@3.08,-25.943
NetIC5_5: IC5.5 IC8.4 R19.1 | length 12.1
  Top Layer w0.254: R19.1 -0.441,-26.949 IC8.4 ; IC5.5 IC5.5@0.63,-35.735 ; IC5.5@0.63,-34.995 0.63,-26.1 IC8.4@0.976,-25.755
PWM0: H2.16 IC6.3 | length 86.1
  Top Layer w0.254: IC6.3@17.996,-73.547 v1(20.846,-76.397) ; H2.16@19.295,-1.265 19.295,-1.543 20.523,-2.771 v1(20.523,-14.402)
  Bottom Layer w0.254: v1(20.523,-14.402) 25.467,-19.346 25.467,-63.898 25.031,-64.334 25.031,-76.397 v1(20.846,-76.397)
PWM1: H2.18 IC7.3 pad.12 | length 82.7
  Top Layer w0.254: pad.12 -1.898,-63.125 IC7.3@0.452,-65.475
  Bottom Layer w0.254: pad.12 14.021,-45.521 14.021,-13.09 14.69,-12.421 19.913,-12.421 22.95,-9.384 22.95,-5.907 21.984,-4.941 21.375,-4.941 20.713,-4.279 20.713,-2.679 21.844,-1.548 H2.18 ; H2.18@21.835,-1.27 H2.18@21.835,-1.265
PWM2: H2.20 IC8.3 pad.6 | length 46.7
  Top Layer w0.254: pad.6 -0.185,-22.075 IC8.3@1.165,-23.425
  Bottom Layer w0.254: pad.6 -0.37,-6.644 1.333,-4.941 1.992,-4.941 2.933,-4.001 2.933,-3.342 3.873,-2.401 4.532,-2.401 5.473,-1.461 5.473,-0.802 6.699,0.425 22.685,0.425 H2.20@24.375,-1.265
SCK: H2.49 U10.5 U11.5 U12.16 | length 148.2
  Top Layer w0.254: U10.5 31.737,-38.722 25.552,-44.907 25.552,-57.937 34.366,-66.751 48.971,-66.751 50.956,-64.767 U11.5 ; U12.16 62.789,-69.748 62.814,-69.723 62.814,-65.227 67.31,-60.731 67.31,-41.732 75.921,-33.122 75.921,-9.957 74.016,-8.052 70.865,-8.052 65.492,-2.679 64.555,-2.679 63.424,-3.81 H2.49
VX-X: D6.A L3.2 U11.9 | length 13.5
  Top Layer w0.254: U11.9 51.956,-52.946 ; L3.2 53.619,-51.283 51.956,-52.946 ; D6.A 55.35,-52.946 51.956,-52.946
VX-Y: D10.A L1.2 U10.9 | length 19.9
  Top Layer w0.254: D10.A@39.958,-49.797 47.879,-41.876 L1.2 47.832,-39.722 U10.9
VX-Z: D5.A L2.2 U12.8 | length 18.1
  Top Layer w0.254: L2.2 43.536,-80.594 49.608,-80.594 51.093,-79.109 51.093,-81.157 D5.A
pads on no net: H1.1 H1.3 H1.4 H1.5 H1.6 H1.7 H1.8 H1.9 H1.10 H1.11 H1.12 H1.13 H1.14 H1.15 H1.16 H1.17 H1.18 H1.19 H1.20 H1.21 H1.22 H1.23 H1.24 H1.25 H1.26 H1.29 H1.30 H1.31 H1.32 H1.33 H1.34 H1.35 H1.36 H1.37 H1.38 H1.39 H1.40 H1.42 H1.44 H1.45 H1.46 H1.47 H1.48 H1.49 H1.50 H1.51 H1.52 H2.1 H2.2 H2.3 H2.4 H2.5 H2.6 H2.7 H2.8 H2.10 H2.13 H2.14 H2.15 H2.17 H2.19 H2.21 H2.22 H2.23 H2.24 H2.25 H2.26 H2.29 H2.31 H2.33 H2.34 H2.35 H2.36 H2.37 H2.38 H2.39 H2.40 H2.41 H2.42 H2.43 H2.44 H2.45 H2.46 U1.2 U1.3 U1.4 U1.5 U1.6 U1.7 U1.12 U1.14 U1.15 U1.16 U1.17 U1.19 U1.21 U1.22 U2.3 U2.8 U2.9 U2.10 U2.11 U3.C1 U3.D2 U3.D4

## Polygon pours and split planes (outlines as drawn)
3.3V on Signal Layer 1 "Signal Layer 1- 3V3" (solid, pour order 12): 36.043,-0.127 36.068,-0.102 44.272,-0.102 44.272,0.254 45.364,1.346 45.364,2.845 76.225,2.845 76.86,2.21 76.86,-41.25 76.835,-41.275 76.835,-41.605 69.139,-41.58 68.402,-42.037 66.98,-43.485 67.031,-53.772 68.478,-55.626 76.429,-55.601 76.556,-90.322 44.958,-90.424 44.272,-88.443 25.679,-88.494 25.197,-72.771 -0.584,-72.669 -0.432,-67.589 28.296,-67.64 27.991,-40.996 25.476,-40.945 25.349,-31.09 -0.432,-30.836 -0.457,-28.092 25.349,-28.473 25.197,-12.395 33.147,-12.065 33.172,-5.182 35.941,-5.207
5V on Signal Layer 1 "Signal Layer 1- 5V" (solid, pour order 8): 35.738,-0.127 23.343,-0.127 22.25,0.965 22.301,1.016 22.301,2.743 -10.541,2.743 -11.278,2.007 -11.278,-39.776 -8.814,-42.24 -8.788,-42.24 -8.788,-54.864 -10.998,-57.074 -10.998,-90.856 -10.922,-90.932 -10.643,-90.653 22.403,-90.653 22.403,-88.748 23.622,-88.392 25.349,-88.341 24.816,-73 -0.94,-73.076 -0.813,-67.132 27.889,-67.158 27.661,-53.518 27.508,-41.478 24.79,-41.377 24.663,-39.599 24.816,-31.42 -0.66,-31.115 -0.686,-27.864 24.892,-28.194 24.892,-11.963 32.969,-11.938 32.969,-8.331 32.995,-4.953 35.763,-4.953
GND on Internal Plane 3 (split plane): 401 vertices, not listed, extent -11.944,-91.565 77.205,3.305

## Other copper
Top Layer:
  text "Z Coil" at -10.87,-14.075 h1.52
  text "Y Coil" at -4.42,-49.682 h1.52
  text "---------- +X" at 76.022,-81.61 h1.52 r90
  text "YUsend-QB50" at 25.121,-82.88 h1.52 r359.99
  text "ACS Bd" at 25.4,-85.293 h1.52 r359.99
  text "H. Chesser, 2016" at 25.679,-87.63 h1.52 r359.99
  text "X Coil" at 12.192,-90.145 h1.52
  text "+Y ----------" at 48.717,-90.195 h1.52

## Dimensions
-12.455,-92.075 to -11.455,3.815 on Mechanical 1
-12.455,-91.075 to 77.715,-91.075 on Mechanical 1

## Text inside footprints (layer, text, board x,y; h text height)
J1: Top Overlay "COIL+" at 15.377,-85.121 h0.52 r270; Top Overlay "COIL-" at 17.409,-85.121 h0.52 r270
J2: Top Overlay "COIL+" at -0.107,-53.371 h0.52 r180; Top Overlay "COIL-" at -0.107,-55.403 h0.52 r180
J3: Top Overlay "COIL+" at 0.306,-16.221 h0.52 r180; Top Overlay "COIL-" at 0.306,-18.253 h0.52 r180
U1: Mechanical 16 "X" at 68.301,-20.625 h0.63 r90; Mechanical 16 "Y" at 66.446,-22.962 h0.63 r90; Mechanical 16 "Z" at 66.243,-21.742 h0.63 r90
U2: Mechanical 16 "X" at 34.519,-24.468 h0.47 r90; Mechanical 16 "Y" at 34.519,-24.849 h0.47 r90; Mechanical 16 "Z" at 34.138,-24.468 h0.47 r90
U3: Top Overlay "A" at 53.53,-22.359 h1.27 r180; Top Overlay "E" at 53.53,-21.227 h1.27 r180; Top Overlay "1" at 51.391,-23.863 h1.27 r270; Top Overlay "5" at 50.259,-23.863 h1.27 r270; Mechanical 13 "A" at 53.53,-22.359 h1.27 r180; Mechanical 13 "E" at 53.53,-21.227 h1.27 r180; Mechanical 13 "1" at 51.391,-23.863 h1.27 r270; Mechanical 13 "5" at 50.259,-23.863 h1.27 r270; Bottom Overlay "A" at 52.895,-22.359 h1.27 r180; Bottom Overlay "E" at 52.895,-21.227 h1.27 r180; Bottom Overlay "1" at 52.661,-23.863 h1.27 r90; Bottom Overlay "5" at 51.529,-23.863 h1.27 r90